# EAGLE board MainStation (EAGLE 5.00)

Size 160 x 100 mm. Coordinates in mm from the lower left corner, seen from the top.
Outline: 0,0 160,0 160,100 0,100 0,0
Copper layers (1*16): Top 0.035mm / dielectric 1.5mm / Bottom 0.035mm
Design rules "default": minimum track width 10mil, minimum drill 24mil, track to track 8mil, track to pad 8mil, pad to pad 8mil, via to via 8mil, smd to smd 8mil, copper to edge 40mil, drill to drill 8mil, minimum pad ring 10mil, minimum via ring 8mil, stop-mask expansion 4mil, vias tented up to drill 0mil, thermal gap 10mil

## Footprints (pad centres in the part's own frame; a part is rotated, then mirrored left to right if it is on the bottom)
C2.5-2 = drill 0.813 pad 1.6 octagon: 1 -1.27,0; 2 1.27,0
E2,5-5 = drill 0.813 pad 1.6 round: + -1.27,0 | drill 0.813 pad 1.6 octagon: - 1.27,0
E3,5-10 = drill 0.813 pad 1.6 round: + -1.778,0 | drill 0.813 pad 1.6 octagon: - 1.778,0
C050-025X075 = drill 0.813 octagon: 1 -2.54,0; 2 2.54,0
DO35-10 = drill 0.813 long: A 5.08,0; C -5.08,0
DIL28-3 = drill 0.813 long: 1 -16.51,-3.81; 2 -13.97,-3.81; 3 -11.43,-3.81; 4 -8.89,-3.81; 5 -6.35,-3.81; 6 -3.81,-3.81; 7 -1.27,-3.81; 8 1.27,-3.81; 9 3.81,-3.81; 10 6.35,-3.81; 11 8.89,-3.81; 12 11.43,-3.81; 13 13.97,-3.81; 14 16.51,-3.81; 15 16.51,3.81; 16 13.97,3.81; 17 11.43,3.81; 18 8.89,3.81; 19 6.35,3.81; 20 3.81,3.81; 21 1.27,3.81; 22 -1.27,3.81; 23 -3.81,3.81; 24 -6.35,3.81; 25 -8.89,3.81; 26 -11.43,3.81; 27 -13.97,3.81; 28 -16.51,3.81
DIL40 = drill 0.813 long: 1 -24.13,-7.62; 2 -21.59,-7.62; 3 -19.05,-7.62; 4 -16.51,-7.62; 5 -13.97,-7.62; 6 -11.43,-7.62; 7 -8.89,-7.62; 8 -6.35,-7.62; 9 -3.81,-7.62; 10 -1.27,-7.62; 11 1.27,-7.62; 12 3.81,-7.62; 13 6.35,-7.62; 14 8.89,-7.62; 15 11.43,-7.62; 16 13.97,-7.62; 17 16.51,-7.62; 18 19.05,-7.62; 19 21.59,-7.62; 20 24.13,-7.62; 21 24.13,7.62; 22 21.59,7.62; 23 19.05,7.62; 24 16.51,7.62; 25 13.97,7.62; 26 11.43,7.62; 27 8.89,7.62; 28 6.35,7.62; 29 3.81,7.62; 30 1.27,7.62; 31 -1.27,7.62; 32 -3.81,7.62; 33 -6.35,7.62; 34 -8.89,7.62; 35 -11.43,7.62; 36 -13.97,7.62; 37 -16.51,7.62; 38 -19.05,7.62; 39 -21.59,7.62; 40 -24.13,7.62
78XXL = drill 1.016 long: GND 0,-3.81; IN -2.54,-3.81; OUT 2.54,-3.81 | hole 3.302: 0,11.176
POWER_JACK_PTH_LOCK = drill 2.997 round: GND 0.025,6.608; GNDBREAK 3.812,10.7 | drill 3.2 round: PWR 0,13.878
520470-3 = drill 0.889 round: 1 -3.175,8.89; 2 -1.905,6.35; 3 -0.635,8.89; 4 0.635,6.35; 5 1.905,8.89; 6 3.175,6.35 | hole 3.251: -5.08,0; 5.08,0
2200-12.7 = drill 0.8 pad 1.27 round: 1 -6.35,0; 2 6.35,0
LED3MM = drill 0.813 octagon: A -1.27,0; K 1.27,0
HC49/S = drill 0.813 round: 1 -2.413,0; 2 2.413,0
0204/5 = drill 0.813 octagon: 1 -2.54,0; 2 2.54,0
0204/7 = drill 0.813 octagon: 1 -3.81,0; 2 3.81,0
MICRO-SD-SOCKET-PP = smd 0.8 x 1.5: 1 -8.94,10.7; 2 -7.84,10.3; 3 -6.74,10.7; 4 -5.64,10.9; 5 -4.54,10.7; 6 -3.44,10.9; 7 -2.34,10.7; 8 -1.24,10.7 | smd 1.8 x 1.4: CD1 -2.05,0.4; CD2 -7.75,0.4 | smd 1.4 x 1.9: GND1 -13.6,14.55; GND3 -0.45,13.55
DIL8 = drill 0.813 long: 1 -3.81,-3.81; 2 -1.27,-3.81; 3 1.27,-3.81; 4 3.81,-3.81; 5 3.81,3.81; 6 1.27,3.81; 7 -1.27,3.81; 8 -3.81,3.81
23A256 = drill 0.8 long: CS -5.08,-5.08; HOLD -2.54,2.54; NC 0,-5.08; SCK 0,2.54; SI 2.54,2.54; SO -2.54,-5.08; VCC -5.08,2.54; VSS 2.54,-5.08
MOLEX-1X6 = drill 1.016 pad 1.88 square: 1 0,0 | drill 1.016 pad 1.88 round: 2 2.54,0; 3 5.08,0; 4 7.62,0; 5 10.16,0; 6 12.7,0
MRF24J40MA = drill 0.8 pad 2.032 square: CS(LOW) 15.748,4.064; GND 0,14.224; GND1 15.748,11.684; GND2 15.748,14.224; INT 0,6.604; NC 15.748,6.604; RESET 0,11.684; SCK 0,1.524; SDI 0,4.064; SDO 15.748,1.524; VIN 15.748,9.144; WAKE 0,9.144
MAGJACK = drill 1 pad 1.88 square: 1 3.175,17.445 | drill 1 pad 1.88 round: 2 4.445,19.985; 3 5.715,17.445; 4 6.985,19.985; 5 8.255,17.445; 6 9.525,19.985; 7 10.795,17.445; 8 12.065,19.985 | drill 1 pad 1.27 round: 9 1,7.1; 10 3.5,7.1; 11 11.7,7.1; 12 14.2,7.1 | drill 1.6 pad 2.184 round: M1 0,14.1; M2 15.2,14.1 | hole 3.2: 1.905,11.095; 13.335,11.095
PN61729-S = drill 0.95 octagon: 1 1.25,4.71; 2 -1.25,4.71; 3 -1.25,2.71; 4 1.25,2.71 | drill 2.3 pad 2.9 round: S1 -6.02,0; S2 6.02,0

## Placement (x,y rotation side)
C1  [C2.5-2]  -71.76,91.91 0 top  (outside the outline)
C2  [C2.5-2]  -38.74,56.35 0 top  (outside the outline)
C3  [C2.5-2]  -32.39,53.81 0 top  (outside the outline)
C4  [C2.5-2]  -32.39,47.46 0 top  (outside the outline)
C5  10uf  [E2,5-5]  -48.9,93.18 0 top  (outside the outline)
C6  470uf  [E3,5-10]  -28.58,51.27 0 top  (outside the outline)
C7  100nf  [C2.5-2]  -47.63,52.54 90 top  (outside the outline)
C8  470uf  [E3,5-10]  -41.28,42.38 0 top  (outside the outline)
C9  10uf  [C2.5-2]  -61.6,10.63 0 top  (outside the outline)
C10  100nf  [C2.5-2]  -122.56,-8.42 90 top  (outside the outline)
C11  100nf  [C2.5-2]  -99.7,-5.88 270 top  (outside the outline)
C12  [C2.5-2]  -98.43,3.01 90 top  (outside the outline)
C13  [C2.5-2]  -107.32,32.22 0 top  (outside the outline)
C14  [C2.5-2]  -109.86,11.9 0 top  (outside the outline)
C15  [C2.5-2]  -100.97,3.01 0 top  (outside the outline)
C16  1nf 2kV!  [C2.5-2]  -130.18,-8.42 90 top  (outside the outline)
C18  100nf  [C050-025X075]  -41.28,86.83 0 top  (outside the outline)
C19  100nf  [C050-025X075]  -50.17,86.83 0 top  (outside the outline)
D1  [DO35-10]  -75.57,67.78 0 top  (outside the outline)
D7  BA243A  [DO35-10]  -75.57,72.86 0 top  (outside the outline)
D8  BA243A  [DO35-10]  -75.57,70.32 180 top  (outside the outline)
D9  BA243A  [DO35-10]  -75.57,75.4 180 top  (outside the outline)
D10  BA243A  [DO35-10]  -75.57,77.94 0 top  (outside the outline)
IC1  ENC28J60SP  [DIL28-3]  -28.58,-9.69 180 top  (outside the outline)
IC2  PIC18F4550_40  [DIL40]  46.35,52.54 270 top
IC3  LM7805  [78XXL]  -98.43,67.78 180 top  (outside the outline)
J1  POWER_JACKPTH_LOCK  [POWER_JACK_PTH_LOCK]  -107.32,91.91 180 top  (outside the outline)
J2  [520470-3]  15.87,94.45 0 top
J5  [520470-3]  -8.26,91.91 0 top  (outside the outline)
L1  [2200-12.7]  -69.22,-28.74 90 top  (outside the outline)
LED1  [LED3MM]  -95.89,-13.5 0 top  (outside the outline)
LED2  [LED3MM]  -81.92,-13.5 0 top  (outside the outline)
LED3  [LED3MM]  -117.48,-13.5 0 top  (outside the outline)
Q1  25Mhz  [HC49/S]  -18.42,85.56 0 top  (outside the outline)
Q2  12Mhz  [HC49/S]  -31.12,85.56 0 top  (outside the outline)
R1  56  [0204/5]  -40.01,-23.66 270 top  (outside the outline)
R2  56  [0204/5]  -79.38,5.55 270 top  (outside the outline)
R3  10k  [0204/7]  -32.39,99.53 0 top  (outside the outline)
R4  10k  [0204/7]  -42.55,99.53 0 top  (outside the outline)
R5  2.32k 1%  [0204/5]  -64.14,-4.61 0 top  (outside the outline)
R6  49.9 1%  [0204/5]  -125.1,-14.77 180 top  (outside the outline)
R7  49.9 1%  [0204/5]  -122.56,-17.31 180 top  (outside the outline)
R8  49.9 1%  [0204/5]  -84.46,-19.85 180 top  (outside the outline)
R9  49.9 1%  [0204/5]  -71.76,-24.93 180 top  (outside the outline)
R10  75  [0204/5]  -130.18,-14.77 90 top  (outside the outline)
R11  75  [0204/5]  -107.32,8.09 0 top  (outside the outline)
R12  500  [0204/5]  -113.67,-16.04 90 top  (outside the outline)
R13  500  [0204/5]  -92.08,-16.04 90 top  (outside the outline)
R14  500  [0204/5]  -78.11,-12.23 90 top  (outside the outline)
U1  USD-SOCKETNEW  [MICRO-SD-SOCKET-PP]  -45.09,-13.5 0 top  (outside the outline)
U2  MCP2551P  [DIL8]  -80.65,29.68 0 top  (outside the outline)
U$1  23A256  [23A256]  19.68,70.32 0 top
U$2  PIC-ICSPPTH  [MOLEX-1X6]  -67.95,34.76 90 top  (outside the outline)
U$3  MRF24J40MA  [MRF24J40MA]  -43.82,29.68 270 top  (outside the outline)
U$6  MAGJACK  [MAGJACK]  -99.7,11.9 0 top  (outside the outline)
X2  PN61729-S  [PN61729-S]  -74.3,19.52 0 top  (outside the outline)

## Library data of the parts
C1-C4 C7 C9-C16 = capacitor-wima
C5 C6 C8 C18 C19 R1-R14 = rcl
D1 D7-D10 = diode
IC1 = microchip-6
IC2 = microchip
IC3 = v-reg
J1 U1 U$2 U$6 = SparkFun
J2 J5 = con-amp
L1 = resistor
LED1-LED3 = led
Q1 Q2 = crystal
U2 = microchip_can
U$1 = 23A256
U$3 = MRF24J40MA
X2 = con-berg

## Nets
3.3V: C12.1 C13.1 C14.1 C15.1 IC1.15 IC1.19 IC1.25 IC1.28 IC2.11 IC2.32 L1.2 U1.4 U$1.VCC U$3.VIN
5V: C5.+ C19.1 IC3.OUT U2.3
12V: C6.+ C8.+ C18.1 D1.A D8.C D9.C IC3.IN
GND: C1.2 C2.2 C3.1 C4.1 C5.- C6.- C7.1 C8.- C9.2 C10.2 C11.1 C12.2 C13.2 C14.2 C15.2 C16.2 C18.2 C19.2 D7.A D10.A IC1.2 IC1.11 IC1.18 IC1.21 IC1.22 IC2.12 IC2.31 IC3.GND J2.1 J2.2 J5.1 J5.2 R5.2 R12.1 R13.1 R14.1 U1.6 U1.CD1 U1.CD2 U1.GND1 U1.GND3 U2.2 U$1.VSS U$2.4 U$3.GND U$3.GND1 U$3.GND2 U$6.10 U$6.12 X2.4 X2.S1 X2.S2
N$1: R1.2 U$6.9
N$2: R2.2 U$6.11
N$3: IC1.7 IC2.36 U1.3 U$3.SDI
N$4: C2.1 IC1.24 Q1.1
N$5: IC1.12 R7.2 U$6.8
N$6: C11.2 L1.1 R8.2 R9.2 R11.1 U$6.3
N$7: C10.1 R6.1 R7.1
N$8: IC1.16 R8.1 U$6.2
N$9: C1.1 IC1.23 Q1.2
N$10: C3.2 IC2.14 Q2.2
N$11: IC1.8 IC2.34 U1.5 U$3.SCK
N$12: IC1.6 IC2.33 U1.7 U$3.SDO
N$13: IC1.9 IC2.35 LED3.A
N$14: C7.2 IC2.18
N$15: IC1.13 R6.2 U$6.7
N$16: IC2.40 U$2.3
N$17: IC2.39 U$2.2
N$18: IC2.1 U$2.6
N$19: IC1.26 R2.1
N$20: IC2.24 X2.2
N$21: C4.2 IC2.13 Q2.1
N$22: IC1.4 IC2.27
N$23: IC2.37 LED1.A U1.2
N$24: IC2.38 LED2.A U$3.CS(LOW)
N$25: IC2.23 X2.3
N$26: U$3.RESET
N$27: D7.C D8.A J1.GND
N$28: D9.A D10.C J1.PWR
N$29: J2.3 J5.3 R4.1 U2.7
N$30: J2.4 J5.4 R3.2 U2.6
N$31: IC2.26 U2.4
N$32: IC2.22 U2.8
N$33: D1.C J2.5 J2.6 J5.5 J5.6
N$34: IC2.2 U$1.SCK
N$35: IC2.30
N$36: IC2.29 U$3.WAKE
N$37: IC2.28 U$3.INT
N$38: IC1.27 R1.1
N$39: R10.1 U$6.6
N$40: IC1.17 R9.1 U$6.1
N$41: IC2.25 U2.1
N$42: C9.1 IC1.1
N$43: IC1.14 R5.1
N$44: C16.1 R10.2 R11.2
N$45: IC2.3 U$1.SI
N$46: IC2.4 U$1.SO
N$47: IC2.5 U$1.CS
N$48: LED3.K R12.2
N$49: LED2.K R14.2
N$50: LED1.K R13.2
VREF: U2.5

## Tracks (layer width: path | path; a pad name or v marks a point on that pad's centre or on a via)
3.3V  (13 unrouted)
5V  (3 unrouted)
12V  (6 unrouted)
GND  (51 unrouted)
N$1  (1 unrouted)
N$2  (1 unrouted)
N$3  (3 unrouted)
N$4  (2 unrouted)
N$5  (2 unrouted)
N$6  (5 unrouted)
N$7  (2 unrouted)
N$8  (2 unrouted)
N$9  (2 unrouted)
N$10  (2 unrouted)
N$11  (3 unrouted)
N$12  (3 unrouted)
N$13  (2 unrouted)
N$14  (1 unrouted)
N$15  (2 unrouted)
N$16  (1 unrouted)
N$17  (1 unrouted)
N$18  (1 unrouted)
N$19  (1 unrouted)
N$20  (1 unrouted)
N$21  (2 unrouted)
N$22  (1 unrouted)
N$23  (2 unrouted)
N$24  (2 unrouted)
N$25  (1 unrouted)
N$27  (2 unrouted)
N$28  (2 unrouted)
N$29  (3 unrouted)
N$30  (3 unrouted)
N$31  (1 unrouted)
N$32  (1 unrouted)
N$33  (4 unrouted)
N$34  (1 unrouted)
N$36  (1 unrouted)
N$37  (1 unrouted)
N$38  (1 unrouted)
N$39  (1 unrouted)
N$40  (2 unrouted)
N$41  (1 unrouted)
N$42  (1 unrouted)
N$43  (1 unrouted)
N$44  (2 unrouted)
N$45  (1 unrouted)
N$46  (1 unrouted)
N$47  (1 unrouted)
N$48  (1 unrouted)
N$49  (1 unrouted)
N$50  (1 unrouted)